# Altium PCB USBDM_Kinets.PcbDoc
Units mil, origin at the board's own origin, x right, y up, seen from the top; angles counter-clockwise.
Board outline 2207.01 x 748.03 mil, 2 copper layers (Top Layer, Bottom Layer); 53 components, 58 nets, 209 pads, 72 vias.
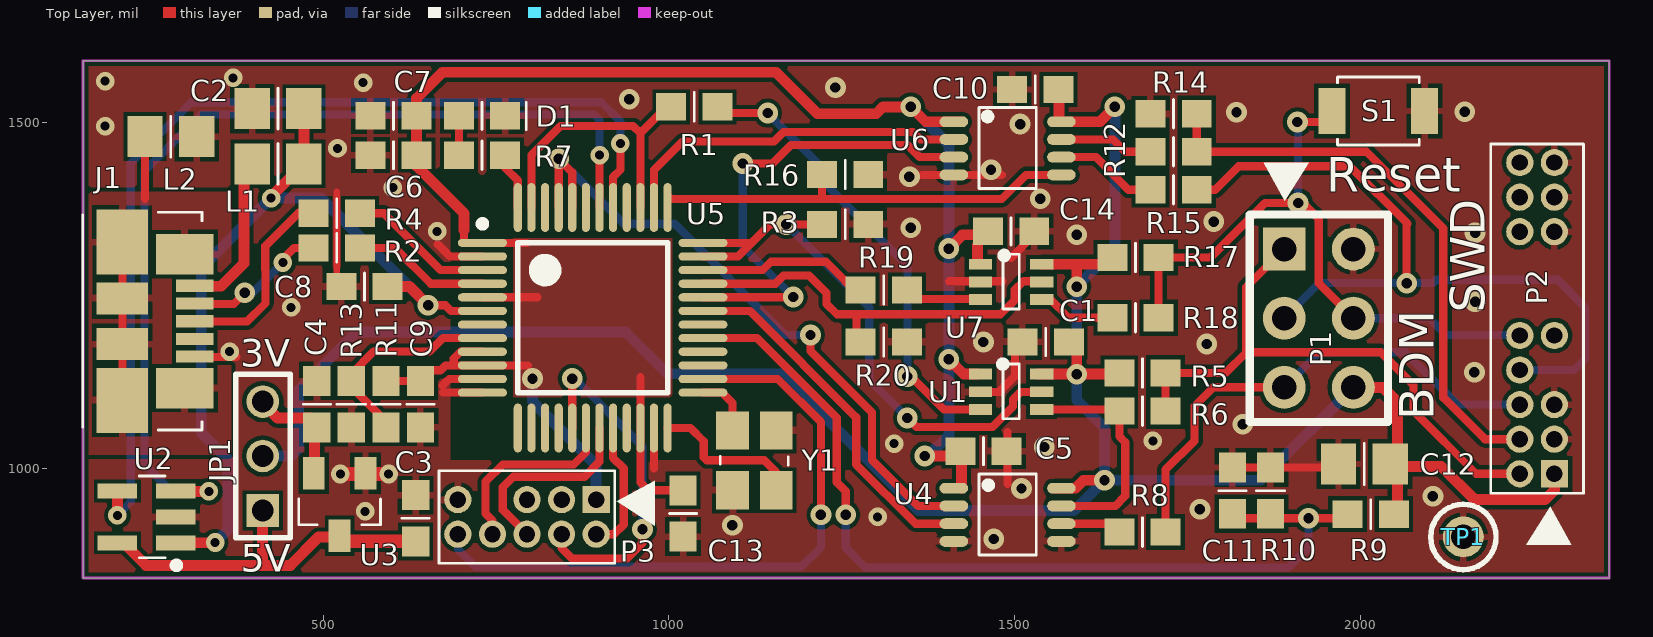
[diagram p0: Top Layer view]
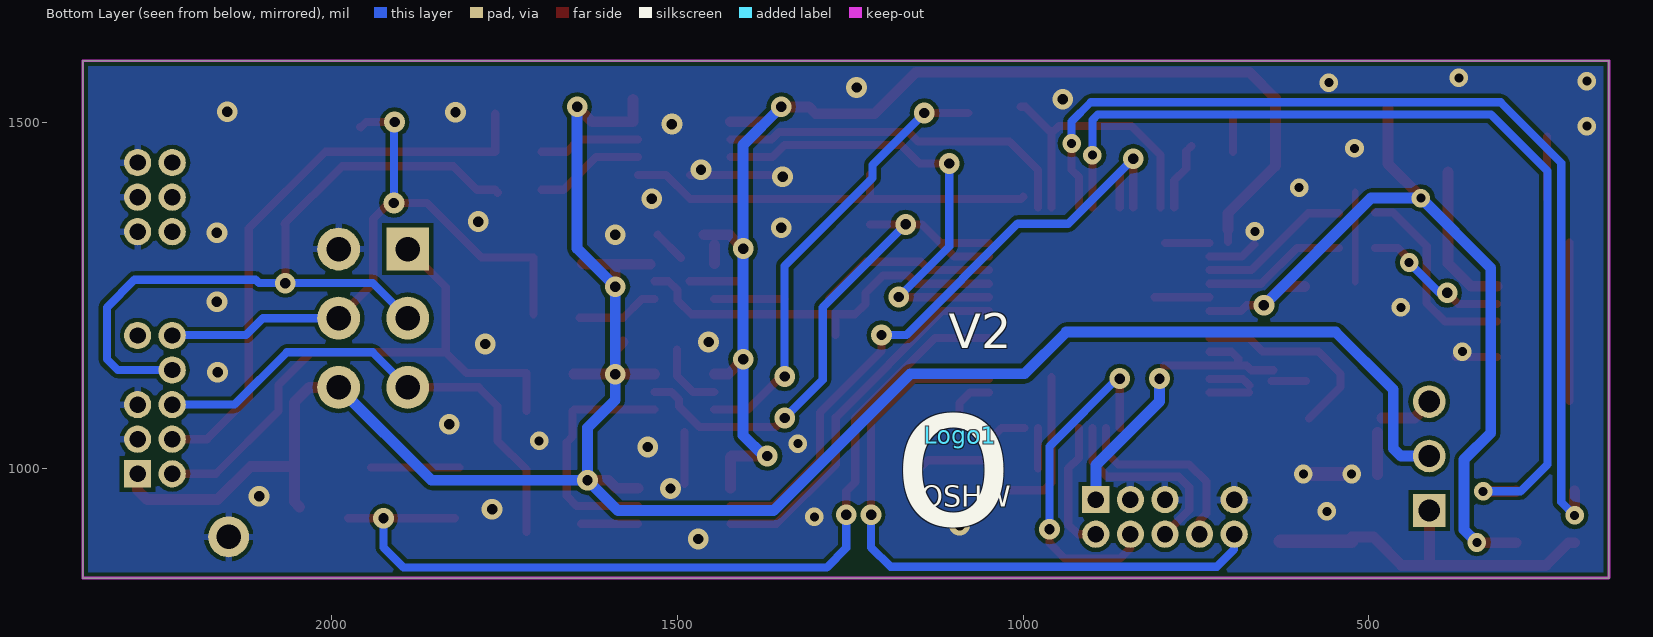
[diagram p1: Bottom Layer view, seen from below]
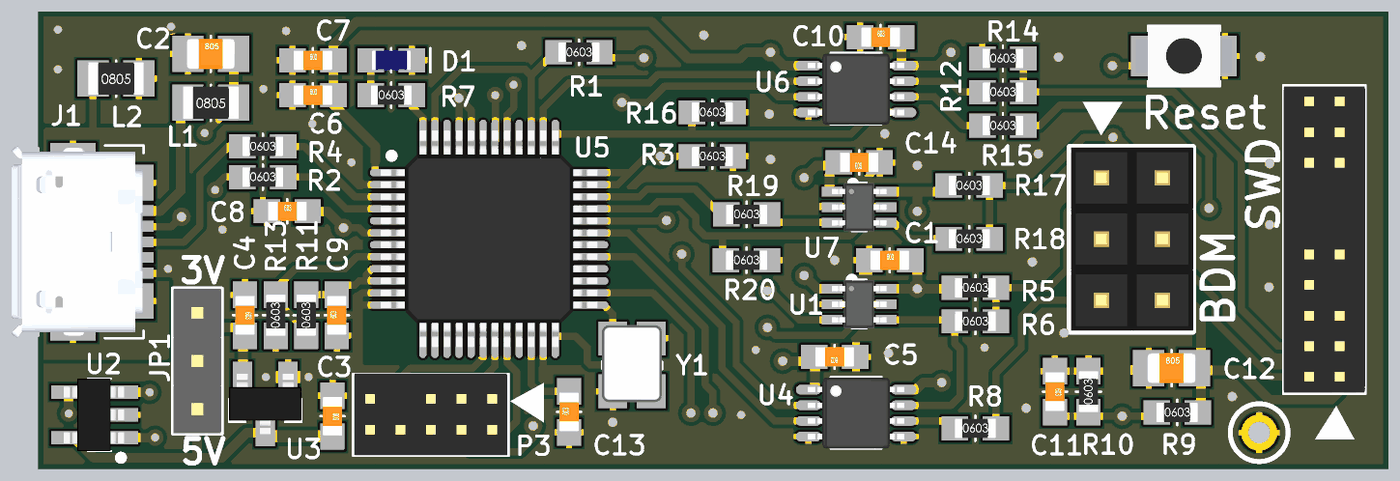
[diagram p2: 3D render of the assembled board from above, using the file's embedded part models]

## Layer stack, top to bottom
Top Solder: solder mask 0.4, Solder Resist, Dk 3.5
Top Layer: signal copper 1.4
Dielectric 1: dielectric 12.6, FR-4, Dk 4.8
Bottom Layer: signal copper 1.4
Bottom Solder: solder mask 0.4, Solder Resist, Dk 3.5

## Board outline
152.99,841.62 2360,841.62 2360,1589.65 152.99,1589.65

## Design rules (kind name [scope] priority, off if disabled: settings)
AssemblyTestPointUsage SilkToBoardRegionClearance_1 [All] p2:
AssemblyTestPointUsage SilkToBoardRegionClearance [All] p3:
Clearance [All] p1: gap=6
HoleSize [All] p1: absolutevalues=TRUE maxlimit=250 minlimit=13 maxpercent=80.000 minpercent=20.000
MatchedLengths DiffPair_DIFF100MatchedLengths [InDifferentialPairClass('DIFF100')] p1: tolerance=6 checknetsindiffpair=TRUE checkdiffpairvsdiffpair=FALSE checkothers=FALSE
MinimumAnnularRing [All] p1: minimumring=7
MinimumSolderMaskSliver [All] p1 off: minsoldermaskwidth=3.94
MinimumSolderMaskSliver SilkscreenOverComponentPads_2 [All] p2 off: minsoldermaskwidth=10
MinimumSolderMaskSliver SilkToSolderMaskClearance_1 [IsPad] p3 off: minsoldermaskwidth=10
MinimumSolderMaskSliver SilkscreenOverComponentPads_1 [All] p4 off: minsoldermaskwidth=10
MinimumSolderMaskSliver SilkToSolderMaskClearance [IsPad] p5 off: minsoldermaskwidth=10
MinimumSolderMaskSliver SilkscreenOverComponentPads [All] p6 off: minsoldermaskwidth=10
PlaneClearance [All] p1: clearance=10
PlaneConnect [All] p1: planeconnectstyle=Relief reliefexpansion=20 reliefentries=4 reliefconductorwidth=10 reliefairgap=6
PolygonConnect PolygonConnect_Via [IsVia] p1: connectstyle=Direct reliefconductorwidth=10 reliefentries=4 polygonreliefangle="90 Angle" airgapwidth=10
PolygonConnect [All] p2: connectstyle=Relief reliefconductorwidth=10 reliefentries=4 polygonreliefangle="90 Angle" airgapwidth=6
RoomDefinition USBDM_Kinetis [InComponentClass('USBDM_Kinetis')] p1: confinementstyle=ConfineIn formatcopy=TRUE lockcomponents=FALSE outline 100,700 2500,700 2500,1700 100,1700
RoutingVias [All] p1: holewidth=12 width=25 viastyle="Through Hole" minholewidth=12 minwidth=25 maxholewidth=28 maxwidth=50
SilkToBoardRegionClearance SilkToBoardRegionClearance_2 [All] p1 off:
SilkToSilkClearance [All] p1 off: silktosilkclearance=10
SilkToSolderMaskClearance SilkToSolderMaskClearance_2 [IsPad] p1 off: minsilkscreentomaskgap=10 clearancetoexposedcopper=TRUE
SolderMaskExpansion [All] p1: expansion=4
Width [All] p1: maxlimit=100 minlimit=6 preferedwidth=10
23 further rules are at their usual default settings.

## Components (designator, comment, footprint, x,y, rotation, side; value= is the part's Value field where it differs from the comment)
C1 "100nF" CCNP1608-0603 1545,1183 r0 top
C2 "4u7F/16V" CCNP2012-0805 435,1520.46 r0 top
C3 "1uF" CCNP1608-0603 634,928 r270 top
C4 "4u7/6V" CCNP1608-0603 491,1093 r270 top
C5 "100nF" CCNP1608-0603 1455,1025 r180 top
C6 "2u2F" CCNP1608-0603 602,1453 r0 top
C7 "100nF" CCNP1608-0603 602,1510 r0 top
C8 "100nF" CCNP1608-0603 560,1263 r0 top
C9 "100nF" CCNP1608-0603 641,1093 r90 top
C10 "100nF" CCNP1608-0603 1530,1548 r0 top
C11 "10nF" CCNP1608-0603 1815,968 r270 top
C12 "4u7F/16V" CCNP2012-0805 2005.81,1006.46 r0 top
C13 "100nF" CCNP1608-0603 1020.68,935.01 r90 top
C14 "100nF" CCNP1608-0603 1495,1343 r180 top
D1 "LED Red" CD1608-0603 730,1510 r180 top
J1 "USB_MICRO_B_CONNECTOR" "MOLEX - 47346-0001" 262,1213 r0 top
JP1 "Header 1x3 2mm" "HEADER 1X3 (2MM)" 413,1018 r180 top
L1 "FB" CR2012-0805 435,1440.46 r0 top
L2 "FB" CR2012-0805 280,1480 r0 top
Logo1 "OSHW Logo" OSHW 1091,1048 r180 bottom
P1 "BDM2X3" BDM 1890,1317.37 r270 top
P2 "SWD-2x10" "SWD-2X10 - REDUCED" 2280.63,992.37 r90 top
P3 "SWD2X5" SWD-2X5 895,955 r180 top
R1 "1K" CR1608-0603 1037,1523 r0 top
R2 "33R" CR1608-0603 520,1319 r0 top
R3 "2K2" CR1608-0603 1255,1353 r0 top
R4 "33R" CR1608-0603 520,1369 r0 top
R5 "100K" CR1608-0603 1685,1138 r0 top
R6 "47R" CR1608-0603 1685,1083 r0 top
R7 "470R" CR1608-0603 730,1453 r0 top
R8 "47R" CR1608-0603 1685,908 r0 top
R9 "10K" CR1608-0603 2015,934 r0 top
R10 "10K" CR1608-0603 1870,968 r90 top
R11 "100K" CR1608-0603 591,1093 r90 top
R12 "47R" CR1608-0603 1730,1458 r0 top
R13 "0R" CR1608-0603 541,1093 r90 top
R14 "100K" CR1608-0603 1730,1513 r0 top
R15 "47R" CR1608-0603 1730,1403 r0 top
R16 "2K2" CR1608-0603 1255,1425 r0 top
R17 "100K" CR1608-0603 1674.83,1305.01 r0 top
R18 "47R" CR1608-0603 1675,1218 r0 top
R19 "1K" CR1608-0603 1311,1258 r0 top
R20 "2K2" CR1608-0603 1310.81,1183 r0 top
S1 "SW-PB-SMT-B3U" SW_SMT_PB2-B3U 2026,1517 r180 top
TP1 "TP" TP 2149,901 r0 top
U1 "74LVC1T45DCK" SC70_N 1495,1111 r0 top
U2 "MIC2005-0.5YM6-TR" SOT-23-5 245,930 r90 top
U3 "MCP1703T-3302E/CB" SOT23 524,948 r180 top
U4 "74LVC2T45DCT" SSOP8_N 1490,933 r0 top
U5 "MK20DX128VLF5" TSQFP50P900X900-48N 890,1218 r0 top
U6 "74LVC2T45DCT" SSOP8_N 1490,1463 r0 top
U7 "74LVC1T45DCK" SC70_N 1495,1269.72 r0 top
Y1 "XTAL_SMT2_FA-238" "CRYSTAL_SMT - EPSON-FA-238" 1123.75,1011.87 r90 top

## Footprints (in the part's own frame and the unit in brackets; to place one, negate y for a bottom-side part, rotate by r counter-clockwise, add the part's x,y. Pads: shape width x height; smd on the part's side, far side on the other; paste and mask are expansions set on the pad)
BDM [mil] "HCS12 style BDM connector"
  rect 62x62 hole 35.43: 1(0,0)
  round 62 hole 35.43: 2(0,100) 3(100,0) 4(100,100) 5(200,0) 6(200,100)
  silkscreen extent -124,-50 250,150, body extent -50,-49 250,151, height 333
CCNP1608-0603 [mm]
  rect 1.1x1 smd: 1(-0.85,0) 2(0.85,0)
  silkscreen extent 0,-0.5 0,0.5, body extent -0.8,-0.4 0.8,0.4, height 0.3
CCNP2012-0805 [mm]
  rect 1.3x1.5 smd: 1(-0.95,0) 2(0.95,0)
  silkscreen extent 0,-0.75 0,0.75, body extent -1,-0.62 1,0.63, height 0.78
CD1608-0603 [mm]
  rect 1.1x1 smd: A(-0.85,0) K(0.85,0)
  silkscreen extent -1.62,-0.5 0,0.5, body extent -0.8,-0.4 0.8,0.4, height 0.8
CR1608-0603 [mm]
  rect 1.1x1 smd: 1(-0.85,0) 2(0.85,0)
  silkscreen extent 0,-0.53 0,0.53, body extent -0.85,-0.4 0.85,0.4, height 0.56
CR2012-0805 [mm]
  rect 1.3x1.5 smd: 1(-0.95,0) 2(0.95,0)
  silkscreen extent 0,-0.75 0,0.75, body extent -1.15,-0.67 1.15,0.68, height 0.76
"CRYSTAL_SMT - EPSON-FA-238" [mm] "Crystal SMT low profile 3.2 x 2.5"
  rect 1.4x1.2 smd: 1(-1.1,-0.8) 2(1.1,-0.8) 3(1.1,0.8) 4(-1.1,0.8)
  silkscreen extent -0.17,-1.25 0.15,1.25, body extent -1.55,-1.24 1.65,1.26, height 0.7
"HEADER 1X3 (2MM)" [mm]
  rect 1.2x1.2 hole 0.8: 1(0,2)
  round 1.2 hole 0.8: 2(0,0) 3(0,-2)
  silkscreen extent -1,-3 1,3, body extent -1,-3 1,3, height 5
"MOLEX - 47346-0001" [mm] "RECEPTACLE, MICRO USB B, BOTTOM MOUNT"
  rect 1.38x0.45 smd: D+(1.33,0) D-(1.33,0.65) G(1.33,-1.3) ID(1.33,-0.65) Vbus(1.33,1.3)
  rect 1.9x2.38 smd: S1(-1.33,2.91) S4(-1.33,-2.91)
  rect 1.9x1.18 smd: S2(-1.33,0.838) S3(-1.33,-0.838)
  rect 2.1x1.48 smd: S5(0.97,2.46) S6(0.97,-2.46)
  silkscreen extent -2.78,-4 1.6,4, body extent -3.88,-3.99 1.55,3.99, height 2.67
OSHW [mil] "OSHW Logo"
SC70_N [mm] "SC70, 6-Leads, Body 2.15x1.4mm, Pitch 0.65mm, IPC Medium Density"
  rect 0.85x0.4 smd: 1(-1.125,0.65) 2(-1.125,0) 3(-1.125,-0.65) 4(1.125,-0.65) 5(1.125,0) 6(1.125,0.65)
  silkscreen extent -0.43,-0.99 0.3,1.14, body extent -1.14,-1 1.14,1, height 1.1
SOT23 [mm] "SOT-23; 3 Leads; Body 3.0 x 2.3 mm, inc. leads (LxW max)"
  rect 0.8x1.2 smd: 1(-0.95,-1.15) 2(0.95,-1.15) 3(0,1.15)
  silkscreen extent -1.5,-0.2 1.5,0.75, body extent -1.5,-1.25 1.5,1.25, height 1.05
SOT-23-5 [mm]
  rect 0.55x1.45 smd: 1(-0.95,-1.075) 2(0,-1.075) 3(0.95,-1.075) 4(0.95,1.075) 5(-0.95,1.075)
  silkscreen extent -1.9,-1.22 1.5,0.28, body extent -1.5,-1.22 1.5,1.28, height 1.1
SSOP8_N [mm] "SSOP, 8-Leads, Body 2.9x3.2mm, Pitch 0.65mm, IPC Medium Density"
  oval 1.05x0.4 smd: 1(-1.975,0.975) 2(-1.975,0.325) 3(-1.975,-0.325) 4(-1.975,-0.975) 5(1.975,-0.975) 6(1.975,-0.325) 7(1.975,0.325) 8(1.975,0.975)
  silkscreen extent -1.05,-1.47 1.05,1.5, body extent -2.01,-1.47 2.01,1.48, height 1.3
SW_SMT_PB2-B3U [mm] "Miniature SMT Push Button"
  rect 1x1.7 smd: 1(-1.7,0) 2(1.7,0)
  silkscreen extent -1.5,-1.25 1.5,1.25, body extent -2,-1.25 2,1.25, height 1.6
SWD-2X5 [mm] "Connector; SWD; 2x5 Position"
  rect 1x1 hole 0.6: 1(0,0)
  round 1 hole 0.6: 2(0,1.27) 3(1.27,0) 4(1.27,1.27) 5(2.54,0) 6(2.54,1.27) 8(3.81,1.27) 9(5.08,0) 10(5.08,1.27)
  silkscreen extent -2.15,-1.06 5.77,2.33, body extent -0.63,-1.09 5.72,2.31, height 4.5
"SWD-2X10 - REDUCED" [mm] "Connector; SWD; 2x10 Position"
  rect 1x1 hole 0.6: 1(0,0)
  round 1 hole 0.6: 2(0,1.27) 3(1.27,0) 4(1.27,1.27) 5(2.54,0) 6(2.54,1.27) 8(3.81,1.27) 9(5.08,0) 10(5.08,1.27) 15(8.89,0) 16(8.89,1.27) 17(10.16,0) 18(10.16,1.27) 19(11.43,0) 20(11.43,1.27)
  silkscreen extent -2.6,-1.07 12.12,2.34, body extent -0.64,-1.06 12.06,2.34, height 4.5
TP [mm] "Testpoint (small)"
  round 1.5 hole 0.9: 1(0,0)
  silkscreen extent -1.2,-1.2 1.2,1.2
TSQFP50P900X900-48N [mm] "Thin QFP, 48-Leads, Body 7x7mm, Pitch 0.5mm, IPC Medium Density"
  oval 1.8x0.3 smd: 1(-4.05,2.75) 2(-4.05,2.25) 3(-4.05,1.75) 4(-4.05,1.25) 5(-4.05,0.75) 6(-4.05,0.25) 7(-4.05,-0.25) 8(-4.05,-0.75) 9(-4.05,-1.25) 10(-4.05,-1.75) 11(-4.05,-2.25) 12(-4.05,-2.75) 25(4.05,-2.75) 26(4.05,-2.25) 27(4.05,-1.75) 28(4.05,-1.25) 29(4.05,-0.75) 30(4.05,-0.25) 31(4.05,0.25) 32(4.05,0.75) 33(4.05,1.25) 34(4.05,1.75) 35(4.05,2.25) 36(4.05,2.75)
  oval 0.3x1.8 smd: 13(-2.75,-4.05) 14(-2.25,-4.05) 15(-1.75,-4.05) 16(-1.25,-4.05) 17(-0.75,-4.05) 18(-0.25,-4.05) 19(0.25,-4.05) 20(0.75,-4.05) 21(1.25,-4.05) 22(1.75,-4.05) 23(2.25,-4.05) 24(2.75,-4.05) 37(2.75,4.05) 38(2.25,4.05) 39(1.75,4.05) 40(1.25,4.05) 41(0.75,4.05) 42(0.25,4.05) 43(-0.25,4.05) 44(-0.75,4.05) 45(-1.25,4.05) 46(-1.75,4.05) 47(-2.25,4.05) 48(-2.75,4.05)
  silkscreen extent -4.17,-2.75 2.75,3.57, body extent -4.5,-4.5 4.5,4.5, height 1.6

## Part data
C1 C5 C7 C8 C9 C10 C11 C13 C14: library part Cap, "Capacitor"
C2 C12: library part Cap_CCNP_0805, "Capacitor SMT 0805"
C3: library part Cap, "Capacitor SMT"
C4 C6: library part Cap_CCNP_0603, "Capacitor SMT 0603"
D1: library part "LED SMT,Red-0603", "LED (Red 0603)"
J1: "USB Micro-B Connector"
JP1: "Header, 1x3, 2mm"
L1 L2: library part "Ferrite Bead 0805", "Ferrite Bead (0805) 0.045OHM, 2A"
P2: library part SWD2X10-Reduced, "SWD Connector 2x10-Pin"
P3: "SWD Connector 2x5-Pin"
R1 R3 R5 R6 R7 R8 R9 R10 R12 R14 R15 R16 R17 R18 R19 R20: library part Res, "Resistor SMT"
R2 R4: library part Res, "Resistor"
R11 R13: library part Res_CR0603, "Resistor"
S1: "Switch OMRON B3U series"
TP1: "Test Point"
U1 U4 U6 U7: "Dual voltage bidirection buffer"
U2: "Power Switch"
U3: "3V3 LDO regulator"
U5: "Arm Cortex M4"
Y1: "Crystal (EPSON  Q22FA23800065 FA-238 24 MHZ 12.0PF)"

## Via types
v1: diameter 30, hole 15, Top Layer to Bottom Layer, tented both sides, 50 vias
v2: diameter 27, hole 13, Top Layer to Bottom Layer, tented both sides, 22 vias

## Nets (pads, with @x,y where several pads share a name; then routed paths per layer and width w, separated by ;. In a path a pad name is that pad's centre, name@x,y a point inside that pad or via, vN(x,y) a via of type N, cw(c..) or ccw(c..) an arc to the next point about the centre after c; other vN are vias at no path point)
3V3: C5.2 C6.2 C7.2 C9.2 C13.2 C14.2 P3.1 R11.2 U1.1 U4.1 U5.1 U5.5 U5.9 U5.10 U5.22 U6.1 U7.1 | length 2710
  Top Layer w11.81: R11.2 C9.2 ; C9.2@638,1142 670,1142 677.1,1149.1 689.1,1149.1 ; U5.1@704,1328 704,1345 ; U5.9 698.79,1168.79 689.1,1159.1 689.1,1149.1 ; U5.5 810,1247.53 ; U5.1 794.73,1326.27 ; 796.1,1149.1 U5.10 689.1,1149.1 ; 958.9,1131.9 U5.22 958.9,979.86 970.29,968.47 C13.2
  Top Layer w15.75: 704,1345 704,1369 635.46,1437.54 C6.2 C7.2 635.46,1535.46 673,1573 1155,1573 1215,1513 1300,1513 1310,1523 v1(1350,1523) 1371.61,1501.39 U6.1@1423.07,1501.39 ; v1(1370,1018) C5.2@1421.54,1018 ; v1@1405,1151.39 v1@1406.53,1149.86 ; v1(1405,1158) 1426.61,1136.39 U1.1@1446.69,1136.39 ; v1@1405,1313 v1(1405,1318) 1425,1338 C14.2@1461.54,1338 ; U4.1@1423.07,971.39 C5.2@1423.07,1016.46 ; U7.1@1446.69,1296.39 1446.69,1323.16
  Bottom Layer w15.75: v1(803,1130) 803,1097 895,1005 P3.1 ; v1(1350,1523) 1405,1468 v1(1405,1318) v1(1405,1158) 1405,1048 1375,1018 v1(1370,1018)
5V: C2.2 C8.2 L1.2 U2.1 U5.6 | length 1212
  Top Layer w11.81: v1(652,1236) 677,1236 685.16,1227.84 U5.6
  Top Layer w15.75: U2.1 v2@344,892.6 ; v2(425,1391) 425,1393.06 L1.2 C2.2 ; C8.2 625,1263 v1(652,1236)
  Bottom Layer w15.75: v2(344,893) 362.37,911.37 362.37,1013 324,1051.37 324,1290 v2(425,1391) 497,1391 v1(652,1236)
ADC0_DP0: U5.7
BKGD/SWD_DIR: R3.1 U1.5 U5.35 U5.36 | length 834.9
  Top Layer w11.81: U5.35 1100.21,1306.58 1119.89,1326.27 ; U5.36 1119.89,1326.27 ; R3.1 v1(1170,1353) 1146.62,1353 1119.89,1326.27 ; v1(1345,1073) 1358.05,1059.95 1468.05,1059.95 1497.64,1089.55 1497.64,1099.63 1508.81,1110.8 U1.5@1533.31,1110.8
  Bottom Layer w11.81: v1(1170,1353) 1290,1233 1290,1128 v1(1345,1073)
BKGD/SWD_I: U4.2 U5.44 U5.45 | length 993.5
  Top Layer w11.81: U5.45 v1(840.79,1448) 860.47,1428.31 U5.44 ; v1(1205,1193) 1205,1170 1294,1081 1294,1012 1360.2,945.8 U4.2@1423.07,945.8
  Bottom Layer w11.81: v1(840.79,1448) 934.79,1354 1008,1354 1169,1193 v1(1205,1193)
BKGD/SWD_O: R1.1 U5.39 U5.47 | length 423.1
  Top Layer w11.81: U5.47 801.42,1453.42 843.41,1495.41 948.49,1495.41 958.9,1485 ; U5.39 958.9,1485 ; R1.1 996.9,1523 958.9,1485
DBG_RX: U4.3 U5.31 | length 541
  Top Layer w11.81: U5.31 1117.16,1227.84 1271,1074 1271,1005.83 1356.63,920.2 U4.3@1423.07,920.2
DBG_TX: U5.32 U6.3 | length 688.1
  Top Layer w11.81: U5.32 v1@1180,1247.53 ; v1(1107,1441) 1150,1441 1176.66,1467.66 1345.34,1467.66 1362.8,1450.2 U6.3@1423.07,1450.2
  Bottom Layer w11.81: v1(1107,1441) 1107,1321 v1(1180,1248)
EXTAL: U5.25 Y1.3 | length 82.5
  Top Layer w11.81: U5.25 1077.27,1109.73 1092.25,1094.75 Y1.3@1092.25,1061.28
EXTAL32: U5.15
GND: C1.1 C2.1 C3.1 C4.1 C5.1 C6.1 C7.1 C8.1 C9.1 C10.1 C11.1 C12.1 C13.1 C14.1 D1.A J1.G L2.2 P1.2 P2.3 P2.5 P2.15 P2.17 P2.19 P3.3 P3.5 P3.9 R3.2 R10.2 R13.1 R14.1 R16.2 R20.2 S1.1 TP1.1 U1.2 U2.2 U3.1 U4.4 U4.5 U5.2 U5.11 U5.12 U5.23 U6.4 U7.2 Y1.2 Y1.4 | length 1051.8
  Top Layer w9.84: C8.1@520,1269.54 520,1400
  Top Layer w11.81: J1.G@314.72,1161.19 v2@375,1161.19 ; 666,1324 683.42,1306.58 U5.2 ; 673,1120 677.19,1124.19 677.38,1124.19 682.61,1129.42 U5.11 ; 673.73,1109.73 U5.12 ; 978.58,1000 U5.23 ; 1366.61,1424.61 1481.61,1424.61 ; 1405,1270.8 1482.8,1270.8 ; U1.2@1446.69,1110.8 1477.8,1110.8 1500.72,1133.72 1500.72,1144.2 ; 1490,978 1490,1053 ; 1495,1304.54 C14.1@1528.46,1338 ; 1500.74,1144.22 C1.1@1500.74,1172.2 ; C11.1 R10.2 C12.1@1943.35,1001.46
  Top Layer w19.68: v2(525,992) v2@592,992
  other v1: 1470,898 1092,918 1768,941 2105,960 1510,971 1543,1031 1830,1064 2165,1139 1778,1180 1455,1183 2166,1241 1590,1338 2166,1341 1350,1348 1788,1357 1537,1390 1348,1422 1466,1432 1508,1498 1821,1515 2151,1516 943,1534 1241,1551
  other v2: 1302,930 561,938 595,992 1326,1036 1700,1040 365,1169 454,1233 665,1343 601,1406 521,1463 185,1495 558,1558 185,1560 370,1565
ID: R11.1 R13.2 U5.8 | length 294.6
  Top Layer w11.81: R11.1@586.56,1072.15 541,1117.71 R13.2 541,1137 573,1169 654.06,1169 673.53,1188.47 U5.8
LED: R7.2 U5.48 | length 99.5
  Top Layer w11.81: R7.2@756.54,1466.46 764.23,1458.77 764.23,1433.77 781.73,1416.27 U5.48
NetD1_K: D1.K R7.1 | length 53.9
  Top Layer w11.81: R7.1@696.54,1458 D1.K@696.54,1511.94
NetJ1_D+: J1.D+ R4.1 | length 291.1
  Top Layer w11.81: J1.D+@314.72,1212.37 390.37,1212.37 417,1239 417,1287.07 416.59,1287.48 416.59,1321.59 465,1370 R4.1@491.54,1370
NetJ1_D-: J1.D- R2.1 | length 213.3
  Top Layer w11.81: J1.D-@314.72,1237.96 370.96,1237.96 v1(387,1254) ; v2(442,1298) 442,1303 458,1319 R2.1@491.54,1319
  Bottom Layer w11.81: v1(387,1254) 398,1254 v2(442,1298)
NetJ1_VBUS: J1.Vbus L1.1 | length 217.1
  Top Layer w15.75: J1.Vbus@314.72,1263.55 352.7,1263.55 378,1288.85 386,1296.85 L1.1@386,1428.87
NetR1_2: R1.2 U1.3 | length 649.7
  Top Layer w11.81: R1.2@1079.46,1514 v1(1143,1514) ; v1(1345,1133) 1350,1133 1397.8,1085.2 U1.3@1446.69,1085.2
  Bottom Layer w11.81: v1(1143,1514) 1218,1439 1218,1420 1345,1293 v1(1345,1133)
NetR6_1: R6.1 U1.4 U4.7 | length 351.5
  Top Layer w11.81: U1.4@1533.31,1085.2 R6.1@1649.33,1085.2 ; U4.7@1556.93,945.8 1645.8,945.8 1660,960 1660,1038 1651.54,1046.46 R6.1
NetR8_1: R8.1 U4.6 | length 82.4
  Top Layer w11.81: U4.6@1556.93,920.2 R8.1@1639.33,920.2
NetR12_1: R12.1 U6.7 | length 147
  Top Layer w11.81: U6.7@1556.93,1475.8 1642.2,1475.8 1660,1458 R12.1
NetR15_1: R15.1 U6.6 | length 159.2
  Top Layer w11.81: U6.6@1556.93,1450.2 1617.8,1450.2 1665,1403 R15.1
NetR18_1: R18.1 U7.4 | length 119.5
  Top Layer w11.81: U7.4@1533.31,1245.2 1551.14,1245.2 1578.34,1218 R18.1
NetR19_2: R19.2 U7.3 | length 101.7
  Top Layer w11.81: R19.2@1345,1245.2 U7.3@1446.69,1245.2
PTA4: U5.21
PTB0: U5.27
PTB1: U5.28
PTB3: U5.30
PTC7: U5.40
PTD2: U5.43
PTD5: U5.46
RESETB: P3.10 U5.26 | length 946.4
  Top Layer w11.81: U5.26 1157.58,1129.42 1220,1067 v1(1220,933)
  Bottom Layer w11.81: P3.10 695,883 720,858 1192,858 1220,886 v1(1220,933)
RST_DIR: R20.1 U5.33 U7.5 | length 578.3
  Top Layer w11.81: U5.33 1154.21,1267.21 1166,1279 1203,1279 1228,1254 1228,1238.05 1243.05,1223 1479.87,1223 1500,1243.13 1500,1258 1512.8,1270.8 U7.5@1533.31,1270.8 ; R20.1@1271.54,1193 1271.54,1221.46
RST_IO: R19.1 U5.34 | length 258.9
  Top Layer w11.81: U5.34 1135.9,1286.9 1148,1299 1227.26,1299 R19.1@1281.06,1245.2
SWCLK_O: U5.38 U6.2 | length 525.8
  Top Layer w11.81: U5.38 978.58,1431.58 1020,1473 1152.24,1473 1165.72,1486.47 1353.13,1486.47 1363.81,1475.8 U6.2@1423.07,1475.8
SWD_CLK: P3.4 U5.17 | length 509.4
  Top Layer w11.81: P3.4 845,885 860,870 940,870 962,892 v1(962,912) ; U5.17 v1(860.47,1130)
  Bottom Layer w11.81: v1@859,1135 962,1032 v1(962,912)
SWD_DIO: P3.2 U5.20 | length 191.7
  Top Layer w11.81: P3.2 920.86,905 935,919.14 935,1000 919.53,1015.47 U5.20
SWD_EN: R16.1 U5.37 U6.5 | length 607.8
  Top Layer w11.81: U5.37@1000,1393 1003.47,1389.53 1481.53,1389.53 1516.61,1424.61 U6.5@1556.93,1424.61 ; 1221.54,1390.06 R16.1
SWD_RX: P3.8 U5.18 | length 277.9
  Top Layer w11.81: P3.8 745,925 735,935 735,981 760,1006 862.64,1006 880.16,1023.52 U5.18
SWD_TX: P3.6 U5.19 | length 286.3
  Top Layer w11.81: P3.6 760,940 760,973 775,988 878,988 899.84,1009.84 U5.19
T_BKGD/SWD: P1.1 P2.2 R5.2 R6.2 | length 846.8
  Top Layer w11.81: R6.2 R5.2 1805,1138 1835,1168 ; P1.1 1835,1262.37 1835,1168 ; P2.2 2167.63,992.37 2077,1083 2077,1121 2030,1168 1835,1168
T_DBG_RX: P1.3 P2.8 R15.2 | length 1093.2
  Top Layer w11.81: R15.2@1759.35,1398.89 R15.2@1760,1398.24 ; R15.2 1789.99,1403 1823.99,1437 1985,1437 2068,1354 2067,1353 v1(2067,1268)
  Bottom Layer w11.81: P1.3 1940.63,1268 2105,1268 2110,1273 2285,1273 2325,1233 2325,1158 2309.37,1142.37 P2.8 ; v1(2067,1268) 2067,1269 v1@2068,1270
T_DBG_TX: P1.5 P2.6 R8.2 | length 733.5
  Top Layer w11.81: R8.2 1718.46,998.46 1760,1040 1760,1090 1787.37,1117.37 P1.5
  Bottom Layer w11.81: P1.5 1940.63,1168 2065,1168 2140.63,1092.37 P2.6
T_RST: P1.4 P2.10 R17.2 R18.2 S1.2 | length 942
  Top Layer w11.81: R18.2@1708.3,1223 R17.2 1783.4,1305.01 1862.39,1384 v1(1910,1384) 1917,1384 1940,1361 1940,1267.37 P1.4 ; v1(1909,1501) 1950,1501 1958,1493 S1.2@1959,1494
  Bottom Layer w11.81: v1(1910,1384) v1@1910,1501 ; P1.4 2099.37,1217.37 2123.74,1193 2230,1193 P2.10
T_SWCLK: P2.4 R12.2 R14.2 | length 837.6
  Top Layer w11.81: R14.2 R12.2 2009,1458 2120,1347 2120,1102.4 2180.03,1042.37 P2.4
USB_DM: R2.2 U5.4 | length 208.5
  Top Layer w11.81: R2.2@543.46,1319 R2.2 604,1319 655.79,1267.21 U5.4
USB_DP: R4.2 U5.3 | length 221.1
  Top Layer w11.81: R4.2@543.46,1369 588,1369 670.1,1286.9 U5.3
USB_SH: J1.S1 J1.S2 J1.S3 J1.S4 J1.S5 J1.S6 L2.1 | length 319.1
  Top Layer w11.81: J1.S4@210,1097.8 J1.S1@210,1326.94 ; 242.6,1390 L2.1
VBAT: U5.16
VBDM: C11.2 R9.1 R10.1 U5.29 | length 1324.4
  Top Layer w11.81: U5.29 1127.53,1188.47 1243,1073 1243,980 1256,967 v1(1256,933) ; C11.2@1821.54,928 v1(1925,928) R9.1@1976.54,928
  Bottom Layer w11.81: v1(1256,933) 1256,885 1284,857 1896,857 1925,886 v1(1925,928)
VDD_BDM: C1.2 C10.2 C12.2 JP1.2 P1.6 P2.1 R5.1 R9.2 R17.1 U1.6 U4.8 U6.8 U7.6 | length 3452.2
  Top Layer w15.75: U1.6@1533.31,1136.39 v1(1590,1136.39) 1590,1171.46 C1.2 ; U7.6 1590,1295.31 ; U4.8@1556.93,971.39 1588.05,971.39 1599.67,983 v1(1630,983) ; C10.2@1564.32,1533.85 1564.32,1501.39 1623.39,1501.39 v1(1645,1523) ; v1(1590,1263) 1590,1295.31 ; v1@1600,1136.39 R5.1@1649.92,1136.39 ; R17.1@1631.67,1295.31 1590,1295.31 ; R17.1@1631.67,1296.39 R17.1@1637.63,1296.39 ; P1.6 2032.63,1117.37 2054,1096 2054,952 R9.2@2046.53,944.53 ; C12.2@2055.12,1003 2117,1003 2165,955 2267,955 2280.63,968.63 P2.1
  Bottom Layer w15.75: JP1.2@412.73,1008.86 JP1.2@413,1008.86 ; JP1.2 454,1018 465,1029 465,1114 548.13,1197.13 937.87,1197.13 998,1137 1163,1137 1361,939 1586,939 v1(1630,983) ; v1(1645,1523) 1645,1318 v1(1590,1263) 1590,1099 1630,1059 v1(1630,983) ; P1.6 1855.63,983 v1(1630,983)
VDD_EN: U2.3 U5.42 | length 1402.7
  Top Layer w11.81: U5.42 900,1377.61 v2(900,1453)
  Top Layer w15.75: U2.3 287.72,967 v2(335,967)
  Bottom Layer w11.81: v2(335,967) 281,967 242,1006 242,1430 323.78,1511.78 892.22,1511.78 900,1504 v2(900,1453)
VDD_FLT: U2.4 U5.41 | length 1437.4
  Top Layer w11.81: U5.41 919.53,1421.53 930,1432 v2(930,1470)
  Top Layer w15.75: v2(202.68,932.32) U2.4
  Bottom Layer w11.81: v2(202.68,932.32) 222,951.65 222,1442 309.59,1529.59 902.41,1529.59 930,1502 v2(930,1470)
VREFO: U5.13
VRIN: C3.2 JP1.1 U2.5 U3.3 | length 524.3
  Top Layer w15.75: U2.5 211.4,892.6 244,860 453,860 493.72,900.72 U3.3@525,900.72 ; 412.73,861.73 JP1.1@412.73,930.12
  Top Layer w19.68: U3.3@525,894.72 C3.2@628.19,894.72
VROUT: C4.2 JP1.3 U3.2 | length 146.9
  Top Layer w15.75: JP1.3@412.73,1087.6 420.13,1095 420.13,1086.87 434,1073 C4.2@481.54,1073 ; U3.2@487.6,991.28 C4.2@487.6,1052.4
XTAL: U5.24 Y1.1 | length 223.2
  Top Layer w11.81: U5.24 1031.45,1058.55 1050.58,1039.42 1050.58,1016.27 1055,1011.85 1138.15,1011.85 1155.24,994.76 Y1.1
XTAL32: U5.14
pads on no net: J1.ID P2.9 P2.16 P2.18 P2.20

## Polygon pours and split planes (outlines as drawn)
USB_SH on Top Layer "Top Layer-No Net" (solid, remove dead copper, pour order 10): 160,1400 367.12,1400 367.12,1020 160,1020
GND on Top Layer "Top Layer-No Net" (solid, remove dead copper, pour order 8): 151,841.62 151,1589.65 2360,1589.65 2360,841.62
3V3 on Top Layer "Top Layer-No Net" (solid, pour order 6): 772.05,1336.7 1005,1336.7 1005,1102.84 772.05,1102.84
GND on Bottom Layer "Top Layer-No Net" (solid, remove dead copper, pour order 7): 153.58,1589.24 2359.58,1589.24 2359.58,841.21 153.58,841.2

## Keep-outs
Keep-Out Layer:
  the board outline again, w3.94

## Other copper
Top Layer:
  pour cut-out: 683.85,1423 775,1423 775,1013 683.85,1013
  pour cut-out: 1095,1424.15 1095,1333 685,1333 685,1424.15
  pour cut-out: 1096.15,1013 1005,1013 1005,1423 1096.15,1423
  pour cut-out: 685,1011.85 685,1103 1095,1103 1095,1011.85

## Silkscreen, mask and mechanical layers (free items; w line width, h text height)
Top Overlay:
  text "Reset" at 1951,1400 h50
  text "SWD" at 2180,1225 h50 r90
  text "3V" at 380,1147 h40
  text "BDM" at 2106,1070 h50 r90
  text "5V" at 381,851 h40
Bottom Overlay:
  text "V2" at 1108,1174 h50

## Dimensions
151,1589.65 to 2360,1589.65 on Mechanical 1
2360,841.62 to 2360,1589.65 on Mechanical 1

## Text inside footprints (layer, text, board x,y; h text height)
Logo1: Bottom Overlay "OSHW" at 1148,945 h30; Bottom Overlay "o" at 1012,842 h400